# Altium PCB PCB_MiniMac-Rev_2022-03-11.pcbdoc
Units mil, origin at the board's own origin, x right, y up, seen from the top; angles counter-clockwise.
Board outline 3313.8 x 3402.11 mil, 2 copper layers (Top Layer, Bottom Layer); 45 components, 36 nets, 173 pads, 51 vias.
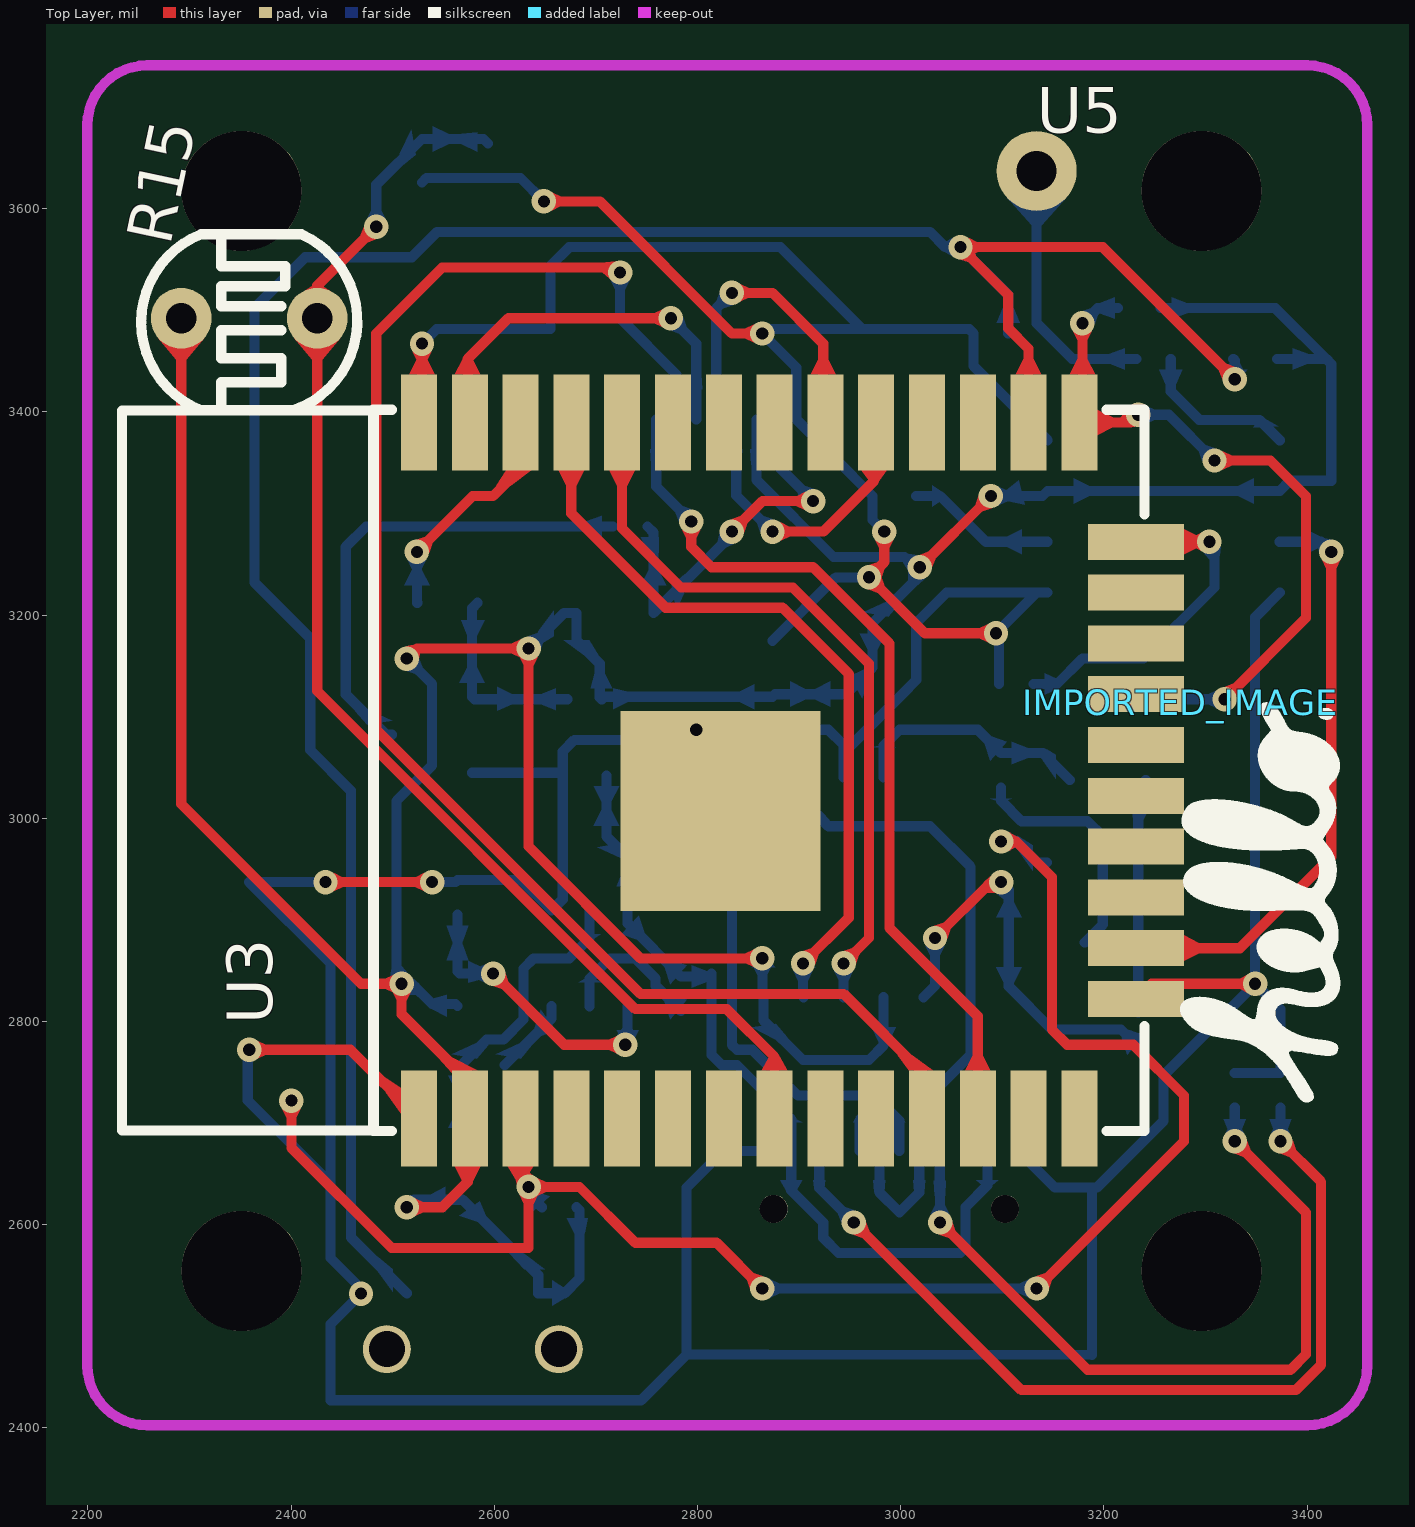
[diagram p0: Top Layer view]
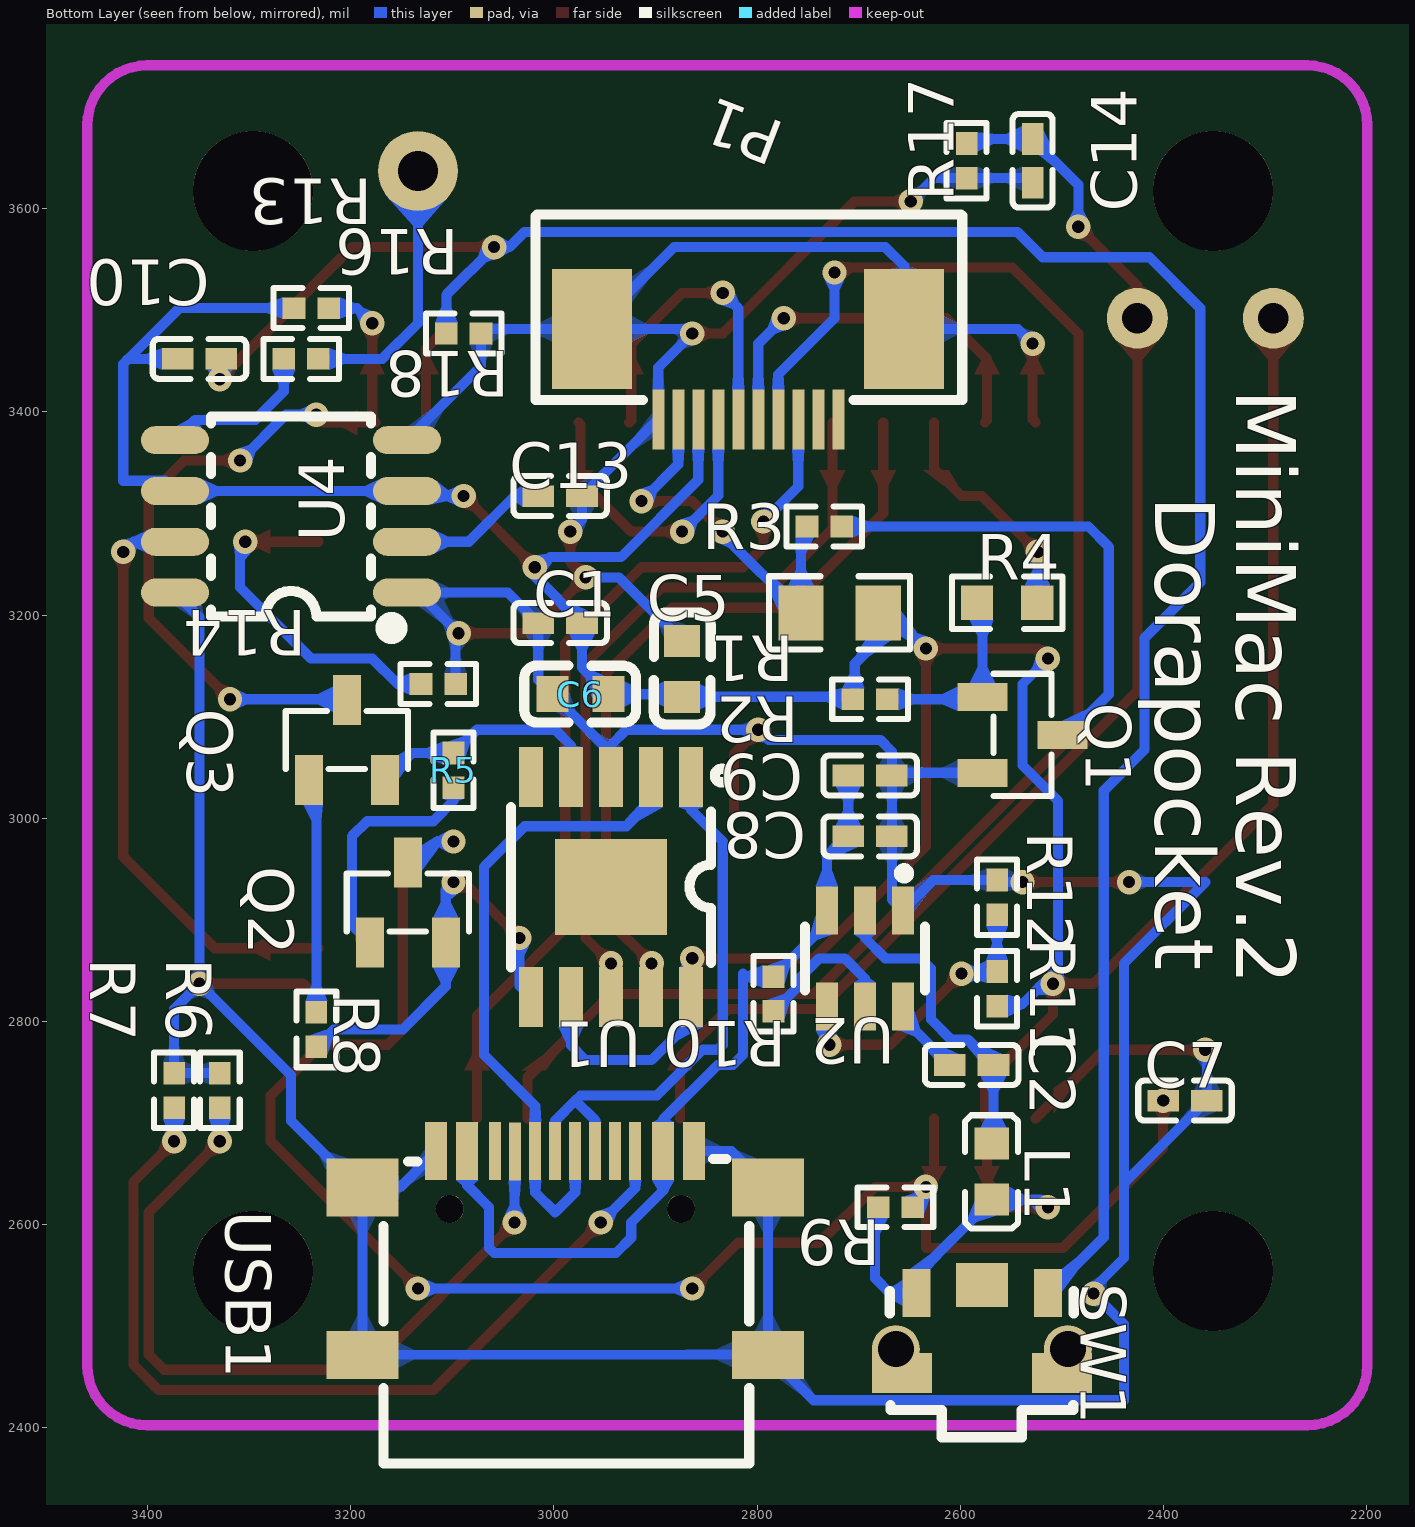
[diagram p1: Bottom Layer view, seen from below]

## Layer stack, top to bottom
Top Layer: signal copper (thickness not stored)
Dielectric: dielectric 12.6, FR-4, Dk 4.8
Bottom Layer: signal copper (thickness not stored)

## Board outline
4313.8,1000 1000,1000 1000,4402.11 4313.8,4402.11

## Components (designator, comment, footprint, x,y, rotation, side; value= is the part's Value field where it differs from the comment)
C1 "100nF" C0402 2993.8,3192.11 r0 bottom
C2 "100nF" C0402 2588.8,2757.11 r0 bottom
C5 "22uF 0603" C0603 2873.8,3147.11 r90 bottom
C6 "22uF 0603" C0603 2973.8,3122.11 r0 bottom
C7 "100nF" C0402 2378.8,2722.11 r180 bottom
C8 "10uF" C0402 2688.8,2982.11 r0 bottom
C9 "10uF" C0402 2688.8,3042.11 r0 bottom
C10 "100nF" C0402 3348.8,3452.11 r180 bottom
C13 "20nF" C0402 2993.8,3317.11 r0 bottom
C14 "100nF" C0402 2528.8,3647.11 r270 bottom
IMPORTED_IMAGE "IMPORTED_IMAGE" IMPORTED_IMAGE 3275.34,3113.97 r0 top
L1 "2.2uH 0603" L0603 2568.8,2652.11 r270 bottom
P1 "FPC 0.5MM 10P 下接" FPC-SMD_FPC0.5MM10P 2808.8,3437.11 r180 bottom
Q1 "S8050" SOT-23-3_L2.9-W1.3-P1.90-LS2.4-BR 2538.8,3082.11 r180 bottom
Q2 "SS8050" SOT-23-3_L2.9-W1.3-P1.90-LS2.4-BR 3143.8,2917.11 r90 bottom
Q3 "SS8050" SOT-23-3_L2.9-W1.3-P1.90-LS2.4-BR 3203.8,3077.11 r90 bottom
R1 "0Ω" R0805 2718.8,3202.11 r180 bottom
R2 "10kΩ" R0402 2688.8,3117.11 r180 bottom
R3 "1Ω" R0402 2733.8,3287.11 r180 bottom
R4 "220Ω" R0603 2553.8,3212.11 r0 bottom
R5 "10kΩ" R0402 3098.8,3047.11 r90 bottom
R6 "2kΩ" R0402 3328.8,2732.11 r90 bottom
R7 "2kΩ" R0402 3373.8,2732.11 r90 bottom
R8 "10kΩ" R0402 3233.8,2792.11 r90 bottom
R9 "10kΩ" R0402 2663.8,2617.11 r180 bottom
R10 "10kΩ" R0402 2783.8,2827.11 r270 bottom
R11 "33kΩ" R0402 2563.8,2832.11 r90 bottom
R12 "10kΩ" R0402 2563.8,2922.11 r90 bottom
R13 "5.1kΩ" R0402 3238.8,3502.11 r180 bottom
R14 "5.1kΩ" R0402 3113.8,3132.11 r0 bottom
R15 "GL5528" RES-TH_L5.1-W4.3-P3.40-D0.5 2358.8,3492.11 r90 top
R16 "1kΩ" R0402 3248.8,3452.11 r180 bottom
R17 "10kΩ" R0402 2593.8,3647.11 r270 bottom
R18 "10kΩ" R0402 3088.8,3477.11 r180 bottom
SW1 "TS-1010A-B" SW-SMD_TS-1010A-B 2578.81,2497.11 r90 bottom
U1 "CH340K" ESOP-10_L4.9-W3.9-P1.00-LS6.2-BL-EP 2943.8,2932.11 r180 bottom
U2 "TPS563208DDCR" TSOT-23-6_L2.9-W1.6-P0.95-LS2.8-BL 2693.8,2862.11 r180 bottom
U3 "ESP32-WROOM-32" WIFIM-SMD_39P-L25.5-W18.0-P1.27 2878.8,3047.11 r90 top
U4 "PT8022WS-S08" SOP-8_L5.0-W4.0-P1.27-LS6.2-BL 3258.8,3297.11 r270 bottom
U5 "焊盘" 焊盘 3133.8,3637.11 r0 top
USB1 "TYPEC-304S-ACP16" USB-C-SMD_TYPEC-304S-ACP16 2988.8,2572.11 r0 bottom
? "" ? 2828.8,1949.56 r0 top
? "" ? 2503.9,2041.09 r0 top
? "" ? 2385.85,2160.38 r0 top
? "" ? 1850.4,3069.61 r0 top

## Footprints (in the part's own frame and the unit in brackets; to place one, negate y for a bottom-side part, rotate by r counter-clockwise, add the part's x,y. Pads: shape width x height; smd on the part's side, far side on the other; paste and mask are expansions set on the pad)
C0402 [mm]
  rect 0.79x0.54 smd: 1(0.545,0) 2(-0.545,0)
  silkscreen extent -1.17,-0.5 1.17,0.5
C0603 [mm]
  rect 0.8x0.9 smd: 1(0.7,0) 2(-0.7,0)
  silkscreen extent -1.39,-0.72 1.41,0.71
ESOP-10_L4.9-W3.9-P1.00-LS6.2-BL-EP [mm]
  rect 0.6x1.5 smd: 1(2,2.75) 2(1,2.75) 3(0,2.75) 4(-1,2.75) 5(-2,2.75) 6(-2,-2.75) 7(-1,-2.75) 8(0,-2.75) 9(1,-2.75) 10(2,-2.75)
  rect 2.8x2.4 smd: 11(0,0)
  silkscreen extent -2.5,-2 2.94,2.96
FPC-SMD_FPC0.5MM10P [mm]
  rect 0.3x1.5 smd: 1(-2.245,-1.13) 2(-1.746,-1.13) 3(-1.246,-1.13) 4(-0.746,-1.13) 5(-0.246,-1.13) 6(0.254,-1.13) 7(0.754,-1.13) 8(1.254,-1.13) 9(1.754,-1.13) 10(2.254,-1.13)
  rect 2x3 smd: 11(3.901,1.13) 12(-3.901,1.124)
  silkscreen extent -5.32,-0.64 5.35,3.99
IMPORTED_IMAGE [mil]
  silkscreen extent 0,-394 157,0
L0603 [mm]
  rect 0.8x0.864 smd: 1(0.7,0) 2(-0.7,0)
  silkscreen extent -1.41,-0.67 1.42,0.65
R0402 [mm]
  rect 0.566x0.54 smd: 1(0.433,0) 2(-0.433,0)
  silkscreen extent -0.94,-0.5 0.94,0.5
R0603 [mil]
  rect 31.75x34.02 smd: 1(29.66,0) 2(-29.66,0)
  silkscreen extent -55,-26 55,26
R0805 [mil]
  rect 44.59x54.21 smd: 1(38.04,0) 2(-38.04,0)
  silkscreen extent -69,-36 69,36
RES-TH_L5.1-W4.3-P3.40-D0.5 [mil]
  round 60 hole 30: 1(0,66.93) 2(0,-66.93)
  silkscreen extent -91,-106 83,106
SOP-8_L5.0-W4.0-P1.27-LS6.2-BL [mm]
  oval 0.7x1.7 smd: 1(1.905,2.9) 2(0.635,2.9) 3(-0.635,2.9) 4(-1.905,2.9) 5(-1.905,-2.9) 6(-0.635,-2.9) 7(0.635,-2.9) 8(1.905,-2.9)
  silkscreen extent -2.5,-2 2.99,2.71
SOT-23-3_L2.9-W1.3-P1.90-LS2.4-BR [mm]
  rect 1.25x0.7 smd: 1(-1,0.95) 2(-1,-0.95) 3(1,0)
  silkscreen extent -0.73,-1.53 0.73,1.53
SW-SMD_TS-1010A-B [mm]
  rect 1.2x0.7 smd: 1(0.9,-1.65) 2(0.9,1.635)
  rect 1.1x1.3 smd: 3(1.1,0)
  rect 1x1.5 smd: 4(-1.1,-2) 5(-1.1,2)
  round 1.2 hole 0.9: 4(-0.5,-2.15) 5(-0.5,2.15)
  silkscreen extent -2.7,-2.3 0.95,2.3
TSOT-23-6_L2.9-W1.6-P0.95-LS2.8-BL [mm]
  rect 0.55x1.2 smd: 1(0.95,1.2) 2(0,1.2) 3(-0.95,1.2) 4(-0.95,-1.2) 5(0,-1.2) 6(0.95,-1.2)
  silkscreen extent -1.5,-0.8 1.5,2.25
USB-C-SMD_TYPEC-304S-ACP16 [mm]
  rect 1.8x1.45 smd: 13(5.07,-1.632) 14(-5.07,-1.632)
  rect 1.8x1.2 smd: 15(5.07,2.548) 16(-5.07,2.548)
  rect 0.55x1.45 smd: A1B12(3.225,-2.547) A4B9(2.45,-2.547) B1A12(-3.22,-2.547) B4A9(-2.45,-2.547)
  rect 0.3x1.45 smd: A5(1.26,-2.532) A6(0.25,-2.547) A7(-0.25,-2.547) A8(-1.25,-2.547) B5(-1.75,-2.547) B6(-0.75,-2.547) B7(0.75,-2.547) B8(1.75,-2.547)
  round 0.7 hole 0.7 unplated: ""(-2.89,-1.102) ""(2.89,-1.102)
  silkscreen extent -4.6,-2.35 4.54,5.26
WIFIM-SMD_39P-L25.5-W18.0-P1.27 [mm]
  rect 2.4x0.9 smd: 1(-8.7,8.965) 2(-8.7,7.695) 3(-8.7,6.425) 4(-8.7,5.155) 5(-8.7,3.885) 6(-8.7,2.615) 7(-8.7,1.345) 8(-8.7,0.075) 9(-8.7,-1.195) 10(-8.7,-2.465) 11(-8.7,-3.735) 12(-8.7,-5.005) 13(-8.7,-6.275) 14(-8.7,-7.545) 25(8.7,-7.545) 26(8.7,-6.275) 27(8.7,-5.005) 28(8.7,-3.735) 29(8.7,-2.465) 30(8.7,-1.195) 31(8.7,0.075) 32(8.7,1.345) 33(8.7,2.615) 34(8.7,3.885) 35(8.7,5.155) 36(8.7,6.425) 37(8.7,7.695) 38(8.7,8.965)
  rect 0.9x2.4 smd: 15(-5.715,-8.965) 16(-4.445,-8.965) 17(-3.175,-8.965) 18(-1.905,-8.965) 19(-0.635,-8.965) 20(0.635,-8.965) 21(1.905,-8.965) 22(3.175,-8.965) 23(4.445,-8.965) 24(5.715,-8.965)
  rect 5x5 smd: 39(-1.017,1.422)
  silkscreen extent -9.02,-9.17 9.02,16.39
焊盘 [mm]
  round 2 hole 1: 1(0,0)
? [mil]

## Free pads (board coordinates)
  round 118.11 hole 118.11 unplated: ""(2351.28,2554.59) ""(2351.28,3617.58) ""(3296.16,2554.59) ""(3296.16,3617.58)

## Via types
v1: diameter 24, hole 12, Top Layer to Bottom Layer, tented both sides, 51 vias

## Nets (pads, with @x,y where several pads share a name; then routed paths per layer and width w, separated by ;. In a path a pad name is that pad's centre, name@x,y a point inside that pad or via, vN(x,y) a via of type N, cw(c..) or ccw(c..) an arc to the next point about the centre after c; other vN are vias at no path point)
3V3: C1.2 C5.2 C6.2 C10.2 L1.1 P1.3 R1.1 R2.2 R9.2 R11.2 R13.2 R15.1 SW1.2 U1.7 U1.10 U3.2 U4.3 U4.6 | length 4230.9
  Top Layer w10: R15.1 2291.9,3014.01 2468.8,2837.11 v1(2508.8,2837.11) 2508.8,2807.11 2575.8,2740.11 U3.2 2573.8,2702.51 2573.8,2642.11 2548.8,2617.11 v1(2513.8,2617.11) ; v1(2513.8,3157.11) 2523.8,3167.11 v1(2633.8,3167.11) 2633.8,2972.11 2743.8,2862.11 v1(2863.8,2862.11) ; v1(3018.8,3247.11) v1(3088.8,3317.11)
  Bottom Layer w10: v1(2513.8,2617.11) 2521.2,2624.51 2568.8,2624.51 2643.2,2550.21 SW1.2 2669.2,2532.51 2683.8,2547.11 2683.8,2614.11 R9.2 ; v1(2513.8,3157.11) 2538.8,3132.11 2538.8,3052.11 2503.8,3017.11 2503.8,2837.11 v1(2508.8,2837.11) 2518.8,2837.11 2538.8,2817.11 2561.8,2817.11 R11.2 ; v1(2633.8,3167.11) 2668.8,3202.11 R1.1 2680.8,3175.11 2703.8,3152.11 2703.8,3119.11 R2.2 2708.3,3119.51 2873.8,3119.51 2876.4,3122.11 C6.2 2972.3,3148.21 C1.2 3018.8,3238.61 v1(3018.8,3247.11) 3013.8,3247.11 3003.8,3257.11 2933.8,3257.11 2857.9,3333.01 P1.3 ; v1(2863.8,2862.11) 2863.8,2825.11 U1.10 2865.1,2800.81 2903.8,2762.11 2968.8,2762.11 2983.2,2776.51 U1.7 ; v1(3088.8,3317.11) 3139.6,3317.11 U4.3 U4.6 3383,3332.11 3423.8,3332.11 3423.8,3427.11 3423.8,3447.11 ; R13.2 3368.8,3502.11 3423.8,3447.11 ; C10.2 3418.8,3452.11 3423.8,3447.11
+5V: C8.1 C9.1 R10.2 U2.3 USB1.A4B9 USB1.B4A9 | length 826.5
  Bottom Layer w10: C9.1 C8.1 2731.2,2961.21 2731.2,2909.31 2731.2,2896.71 2783.8,2844.11 2810.8,2844.11 2813.8,2847.11 2813.8,2767.11 2823.8,2757.11 2838.8,2757.11 2892.3,2703.61 USB1.B4A9 2892.3,2633.61 2923.8,2602.11 2923.8,2587.11 2938.8,2572.11 2988.8,2572.11 3058.8,2572.11 3063.8,2577.11 3063.8,2617.11 3085.3,2638.61 USB1.A4B9
A4: C14.2 R15.2 R17.2 U3.8 | length 1312.7
  Top Layer w10: R15.2 2425.7,3125.21 2738.8,2812.11 2828.8,2812.11 2875.8,2765.11 U3.8 ; R15.2 2425.73,3524.04 v1(2483.8,3582.11)
  Bottom Layer w10: v1(2483.8,3582.11) 2483.8,3623.61 C14.2 2589.4,3668.61 R17.2@2593.8,3664.11
CS: P1.4 U3.29 | length 304.3
  Top Layer w10: v1(2873.8,3282.11) 2923.8,3282.11 2973.8,3332.11 2973.8,3387.61 U3.29
  Bottom Layer w10: P1.4 2838.2,3317.71 v1(2873.8,3282.11)
D+: U1.1 USB1.A6 USB1.B6 | length 559.8
  Bottom Layer w10: U1.1 2865.1,3008.31 2833.8,2977.11 2833.8,2777.11 2838.8,2772.11 2853.8,2772.11 2898.8,2727.11 2973.8,2727.11 2978.8,2722.11 ; USB1.B6 2959.3,2702.61 2978.8,2722.11 ; USB1.A6 2998.6,2702.31 2978.8,2722.11
D-: U1.2 USB1.A7 USB1.B7 | length 652.5
  Bottom Layer w10: U1.2 2904.4,3016.51 2928.8,2992.11 3028.8,2992.11 3068.8,2952.11 3068.8,2767.11 3018.3,2716.61 USB1.B7 3018.3,2631.61 2998.8,2612.11 2979,2631.91 USB1.A7
DC: P1.8 U3.12 | length 877.6
  Top Layer w10: v1(2793.8,3292.11) 2793.8,3267.11 2813.8,3247.11 2913.8,3247.11 2988.8,3172.11 2988.8,2892.11 3075.8,2805.11 U3.12
  Bottom Layer w10: P1.8 2759.4,3326.51 v1(2793.8,3292.11)
DTR: Q3.2 R5.1 U1.4 | length 241.2
  Bottom Layer w10: U1.4 2983.2,3071.51 2998.8,3087.11 3075.8,3087.11 3098.8,3064.11 3140,3064.11 Q3.2
EN: C7.2 Q2.3 R9.1 U3.3 | length 1693.4
  Top Layer w10: v1(2400.26,2722.11) 2400.3,2675.61 2498.8,2577.11 2633.8,2577.11 v1(2633.8,2637.11) ; U3.3 2625.8,2645.11 v1(2633.8,2637.11) ; v1(2863.8,2537.11) 2818.8,2582.11 2738.8,2582.11 2683.8,2637.11 v1(2633.8,2637.11) ; v1(3098.8,2977.11) 3113.8,2977.11 3148.8,2942.11 3148.8,2792.11 3163.8,2777.11 3228.8,2777.11 3278.8,2727.11 3278.8,2682.11 v1(3133.8,2537.11)
  Bottom Layer w10: v1(2633.8,2637.11) 2633.8,2630.11 R9.1 ; v1(2863.8,2537.11) v1(3133.8,2537.11) ; v1(3098.8,2977.11) 3113.8,2977.11 3134.4,2956.51 Q2.3
GND: C1.1 C5.1 C6.1 C7.1 C8.2 C9.2 C13.2 C14.1 P1.1 P1.11 P1.12 Q1.2 R6.1 R7.1 R12.1 R14.2 R17.1 R18.1 U1.3 U2.1 U3.1 U3.15 U3.38 U3.39 U4.1 U4.4 U4.8 USB1.13 USB1.14 USB1.15 USB1.16 USB1.A1B12 USB1.B1A12 | length 6482.4
  Top Layer w10: v1(2358.8,2772.11) 2458.3,2772.11 U3.1 ; v1(2433.8,2937.11) v1(2538.8,2937.11) ; U3.38 2528.8,3392.61 v1(2528.8,3467.11) ; v1(2648.8,3607.11) 2703.8,3607.11 2833.8,3477.11 v1(2863.8,3477.11) ; v1(2798.8,3087.11) 2822.81,3063.1 U3.39 ; v1(2983.8,3282.11) 2983.8,3252.11 v1(2968.8,3237.11) 3023.8,3182.11 v1(3093.8,3182.11) ; U3.15 3246.8,2837.11 3333.8,2837.11 v1(3348.8,2837.11)
  Bottom Layer w10: v1(2358.8,2772.11) 2357.3,2770.61 C7.1 2438.8,2640.61 ; v1(2433.8,2937.11) 2358.8,2937.11 2438.8,2857.11 2438.8,2587.11 2438.8,2567.11 2468.8,2537.11 v1(2468.8,2532.11) 2438.8,2502.11 2438.8,2427.11 2744.5,2427.11 USB1.16 ; v1(2528.8,3467.11) 2543.3,3481.61 P1.11 2655.2,3543.51 2673.8,3562.11 2881.7,3562.11 P1.12 ; C14.1@2528.8,3625.61 2533.2,3630.11 R17.1 2625.8,3630.11 v1(2648.8,3607.11) ; v1(2538.8,2937.11) 2561.8,2937.11 2563.8,2939.11 2626.6,2939.11 2656.4,2909.31 2667.3,2920.31 C8.2 C9.2 ; Q1.2 2664.7,3044.71 C9.2 ; USB1.B1A12 2825.2,2672.41 USB1.14 USB1.16 ; C5.1 2936.2,3237.11 v1(2968.8,3237.11) ; v1(2983.8,3282.11) 2972.3,3293.61 C13.2 P1.1 2897.2,3443.71 v1(2863.8,3477.11) 2868.1,3481.41 P1.12 ; R14.2 3096.8,3179.11 v1(3093.8,3182.11) 3133.8,3222.11 U4.1 3045.3,3222.11 C1.1 3015.3,3136.01 C6.1 2943.8,3064.51 U1.3 2943.8,3072.11 2928.8,3087.11 v1(2798.8,3087.11) 2788.8,3077.11 2678.8,3077.11 2667.3,3065.61 C9.2 ; USB1.A1B12 3151.8,2636.41 USB1.13 ; U4.4 3071.8,3445.01 R18.1 3067.5,3481.41 P1.12 ; R6.1@3328.8,2749.11 3373.8,2749.11 3373.8,2812.11 v1(3348.8,2837.11) ; U4.8 3348.8,3197.91 v1(3348.8,2837.11) ; USB1.16 2789.5,2472.11 2868.8,2472.11 USB1.15 USB1.13 ; USB1.13 3193.1,2636.41 3258.8,2702.11 3258.8,2747.11 v1(3348.8,2837.11)
IO0: Q3.3 R13.1 U3.25 | length 747.6
  Top Layer w10: v1(3178.8,3487.11) 3178.8,3392.61 U3.25 3226.3,3389.61 v1(3233.8,3397.11) ; v1(3308.8,3352.11) 3363.8,3352.11 3398.8,3317.11 3398.8,3197.11 v1(3318.8,3117.11)
  Bottom Layer w10: v1(3178.8,3487.11) 3193.8,3502.11 R13.1@3213.8,3502.11 ; Q3.3 3204.4,3117.11 v1(3318.8,3117.11) ; v1(3233.8,3397.11) 3263.8,3397.11 v1(3308.8,3352.11)
IO4: C10.1 R18.2 SW1.1 U3.26 | length 2413.3
  Top Layer w10: 3105.8,3482.11 3125.8,3462.11 U3.26 ; 3105.84,3482.11 3105.84,3515.07 v1(3058.8,3562.11) 3198.8,3562.11 v1(3328.8,3432.11)
  Bottom Layer w10: SW1.1 2458.8,2587.61 2458.8,3027.11 2418.8,3067.11 2418.8,3177.11 2363.8,3232.11 2363.8,3502.11 2413.8,3552.11 2518.8,3552.11 2543.8,3577.11 3028.8,3577.11 3043.8,3562.11 v1(3058.8,3562.11) 3105.8,3515.11 R18.2 ; C10.1 3328.8,3450.61 v1(3328.8,3432.11)
L1_2: C2.2 L1.2 U2.2 | length 312.8
  Bottom Layer w10: L1.2 2567.3,2681.11 C2.2 2592.3,2782.11 2608.8,2782.11 2628.8,2802.11 2628.8,2852.11 2638.8,2862.11 2673.8,2862.11 2693.8,2882.11 U2.2@2693.8,2909.31
LEDK: P1.2 R1.2 R3.2 | length 387.3
  Top Layer w10: v1(2833.8,3282.11) 2863.8,3312.11 v1(2913.8,3312.11)
  Bottom Layer w10: R3.2 2756.8,3281.11 R1.2 2833.8,3279.11 v1(2833.8,3282.11) ; P1.2 2877.5,3348.41 v1(2913.8,3312.11)
Q1_1: Q1.1 R2.1 R4.1 | length 189.4
  Bottom Layer w10: R4.1 2578.2,3206.81 Q1.1 2580.6,3117.11 R2.1
Q1_3: Q1.3 R3.1 | length 478.5
  Bottom Layer w10: Q1.3 2493.8,3082.11 2453.8,3122.11 2453.8,3267.11 2473.8,3287.11 R3.1
R5_2: Q2.1 R5.2 | length 239.2
  Bottom Layer w10: R5.2 3098.8,3017.11 3118.8,2997.11 3183.8,2997.11 3198.8,2982.11 3198.8,2895.31 Q2.1
R8_1: Q3.1 R8.1 | length 231.7
  Bottom Layer w10: R8.1@3233.8,2809.11 3233.8,3030.31 Q3.1
R16_1: R16.1 U5.1 | length 262.5
  Bottom Layer w10: U5.1 3133.8,3487.11 3168.8,3452.11 R16.1
RES: P1.7 U3.11 | length 1550.6
  Top Layer w10: v1(2723.8,3537.11) 2718.8,3542.11 2548.8,3542.11 2483.8,3477.11 2483.8,3087.11 2743.8,2827.11 2943.8,2827.11 3025.8,2745.11 U3.11
  Bottom Layer w10: v1(2723.8,3537.11) 2723.8,3492.11 2779.1,3436.81 P1.7
RTS: Q2.2 R8.2 U1.6 | length 408.5
  Top Layer w10: v1(3033.8,2882.11) 3088.8,2937.11 v1(3098.8,2937.11)
  Bottom Layer w10: U1.6 3033.8,2835.11 v1(3033.8,2882.11) ; v1(3098.8,2937.11) 3106.4,2929.51 Q2.2 3106.4,2834.51 3148.8,2792.11 3216.8,2792.11 R8.2
RXD: U1.8 U3.34 | length 741.2
  Top Layer w10: U3.34 2725.8,3285.11 2783.8,3227.11 2893.8,3227.11 2968.8,3152.11 2968.8,2882.11 v1(2943.8,2857.11)
  Bottom Layer w10: U1.8 v1(2943.8,2857.11)
S$151: 
SCL: P1.5 U3.30 | length 319.8
  Top Layer w10: v1(2833.8,3517.11) 2873.8,3517.11 2923.8,3467.11 2923.8,3391.71 U3.30
  Bottom Layer w10: P1.5 2818.5,3501.81 v1(2833.8,3517.11)
SDA: P1.6 U3.37 | length 389.7
  Top Layer w10: U3.37 2573.8,3391.71 2573.8,3452.11 2613.8,3492.11 v1(2773.8,3492.11)
  Bottom Layer w10: v1(2773.8,3492.11) 2798.8,3467.11 P1.6
TFT-BL: R4.2 U3.36 | length 231.6
  Top Layer w10: v1(2523.8,3262.11) 2578.8,3317.11 2598.8,3317.11 2625.8,3344.11 U3.36
  Bottom Layer w10: v1(2523.8,3262.11) 2523.8,3212.41 R4.2
TOUCH: U3.16 U4.7 | length 584.2
  Top Layer w10: U3.16 3333.8,2872.11 3423.8,2962.11 v1(3423.8,3262.11)
  Bottom Layer w10: U4.7 3413.8,3272.11 v1(3423.8,3262.11)
TXD: U1.9 U3.35 | length 765.1
  Top Layer w10: U3.35 2675.8,3300.11 2768.8,3207.11 2883.8,3207.11 2948.8,3142.11 2948.8,2902.11 v1(2903.8,2857.11)
  Bottom Layer w10: v1(2903.8,2857.11) 2903.8,2824.51 U1.9
U2_4: R11.1 R12.2 U2.4 | length 289.6
  Top Layer w10: v1(2598.8,2847.11) 2668.8,2777.11 v1(2728.8,2777.11)
  Bottom Layer w10: R12.2 2563.8,2849.11 2565.8,2847.11 v1(2598.8,2847.11) ; v1(2728.8,2777.11) 2731.2,2779.51 U2.4
U2_5: R10.1 U2.5 | length 151.1
  Bottom Layer w10: U2.5 2693.8,2842.11 2713.8,2862.11 2738.8,2862.11 2758.8,2842.11 2758.8,2835.11 R10.1
U2_6: C2.1 U2.6 | length 76.9
  Bottom Layer w10: C2.1 2656.4,2803.21 U2.6
U3_24: R14.1 U3.24 | length 339.5
  Top Layer w10: U3.24 v1(3303.8,3272.11)
  Bottom Layer w10: R14.1 3153.8,3132.11 3178.8,3157.11 3238.8,3157.11 3308.8,3227.11 3308.8,3272.11 v1(3303.8,3272.11)
U4_2: C13.1 U4.2 | length 147.9
  Bottom Layer w10: C13.1 3038.8,3317.11 3083.8,3272.11 U4.2
U4_5: R16.2 U4.5 | length 159.1
  Bottom Layer w10: R16.2 3265.8,3420.11 3293.8,3392.11 3353,3392.11 U4.5
USB1_A5: R6.2 USB1.A5 | length 768
  Top Layer w10: v1(3038.8,2602.11) 3183.8,2457.11 3383.8,2457.11 3398.8,2472.11 3398.8,2612.11 v1(3328.8,2682.11)
  Bottom Layer w10: USB1.A5 v1(3038.8,2602.11) ; v1(3328.8,2682.11) R6.2
USB1_B5: R7.2 USB1.B5 | length 892.6
  Top Layer w10: v1(2953.8,2602.11) 3118.8,2437.11 3388.8,2437.11 3413.8,2462.11 3413.8,2642.11 v1(3373.8,2682.11)
  Bottom Layer w10: USB1.B5 2919.9,2636.01 v1(2953.8,2602.11) ; v1(3373.8,2682.11) R7.2
pads on no net: P1.9 P1.10 SW1.3 SW1.4 SW1.5 U1.5 U1.11 U3.4 U3.5 U3.6 U3.7 U3.9 U3.10 U3.13 U3.14 U3.17 U3.18 U3.19 U3.20 U3.21 U3.22 U3.23 U3.27 U3.28 U3.31 U3.32 U3.33 USB1. USB1.A8 USB1.B8

## Polygon pours and split planes (outlines as drawn)
GND on Bottom Layer (solid): 1933.8,3902.11 1948.8,3887.11 3813.8,3887.11 3658.8,3732.11 3658.8,2162.11 3648.8,2172.11 1958.8,2172.11 1898.8,2232.11 1643.8,2232.11

## Keep-outs
Keep-Out Layer:
  lines w10: 2199.39,2461.56 ccw(c2258.45,2461.56) 2258.45,2402.51 ; 2199.39,3682.03 cw(c2258.45,3682.03) 2258.45,3741.09 ; 3400.18,2402.51 ccw(c3400.18,2461.56) 3459.23,2461.56 ; 3400.18,3741.09 cw(c3400.18,3682.03) 3459.23,3682.03

## Other copper
Top Layer:
  region net GND: 2516.3,3436.87 2541.3,3436.87 2533.8,3451.87 2523.8,3451.87
  region net SDA: 2561.3,3436.87 2586.3,3436.87 2578.8,3451.87 2568.8,3451.87
  region net TFT-BL: 2636.57,3342.38 2611.57,3342.38 2602,3327.38 2616.14,3327.38
  region net TXD: 2688.34,3342.38 2663.34,3342.38 2670.84,3327.38 2680.84,3327.38
  region net RXD: 2738.3,3342.38 2713.3,3342.38 2720.8,3327.38 2730.8,3327.38
  region net SCL: 2911.3,3436.87 2936.3,3436.87 2928.8,3451.87 2918.8,3451.87
  region net CS: 2986.3,3342.38 2961.3,3342.38 2968.8,3332.11 2978.8,3332.11
  region net IO4: 3113.34,3436.87 3138.34,3436.87 3130.84,3451.87 3120.84,3451.87
  region net IO0: 3193.56,3402.12 3193.56,3377.12 3208.56,3384.62 3208.56,3394.62
  region net IO0: 3166.3,3436.87 3191.3,3436.87 3183.8,3451.87 3173.8,3451.87
  region net U3_24: 3278.99,3284.61 3278.99,3259.61 3293.99,3267.11 3293.99,3277.11
  region net TOUCH: 3279,2884.61 3279,2859.61 3294,2867.11 3294,2877.11
  region net DC: 3063.3,2751.84 3088.3,2751.84 3080.8,2766.84 3070.8,2766.84
  region net RES: 3008.13,2751.84 3031.57,2751.84 3011.14,2766.84 2997,2766.84
  region net A4: 2863.34,2751.84 2888.34,2751.84 2880.84,2765.07 2870.84,2765.07
  region net EN: 2638.34,2657.35 2613.34,2657.35 2620.84,2645.07 2630.84,2645.07
  region net 3V3: 2558.13,2749.69 2583.03,2751.84 2558.23,2764.75 2545.22,2763.63
  region net 3V3: 2586.3,2657.35 2561.3,2657.35 2568.8,2642.35 2578.8,2642.35
  region net GND: 2508.13,2709.82 2508.13,2734.82 2493.13,2744.39 2493.13,2730.25
  region net IO4: 3329.55,3444.09 3316.82,3431.36 3313.71,3440.13 3320.78,3447.2
  region net U3_24: 3295.86,3263.11 3295.86,3281.11 3287.46,3277.11 3287.46,3267.11
  region net USB1_B5: 3385.78,2682.86 3373.05,2670.14 3381.82,2667.03 3388.89,2674.1
  region net USB1_A5: 3340.78,2682.86 3328.05,2670.14 3336.82,2667.03 3343.89,2674.1
  region net 3V3: 2521.74,2608.11 2521.74,2626.11 2530.14,2622.11 2530.14,2612.11
  region net GND: 2366.74,2763.11 2366.74,2781.11 2375.14,2777.11 2375.14,2767.11
  region net EN: 2391.26,2714.18 2409.26,2714.18 2405.26,2705.78 2395.26,2705.78
  region net EN: 2622.07,2639.66 2637.79,2648.43 2630.84,2654.17 2620.84,2648.59
  region net EN: 2641.74,2628.11 2641.74,2646.11 2650.14,2642.11 2650.14,2632.11
  region net EN: 2624.8,2629.18 2642.8,2629.18 2638.8,2620.78 2628.8,2620.78
  region net IO0: 3169.8,3479.18 3187.8,3479.18 3183.8,3470.78 3173.8,3470.78
  region net A4: 2484.55,3570.14 2471.82,3582.86 2468.71,3574.1 2475.78,3567.03
  region net GND: 3340.86,2828.11 3340.86,2846.11 3333.8,2842.11 3333.8,2832.11
  region net GND: 2810.78,3087.86 2798.05,3075.14 2806.82,3072.03 2813.89,3079.1
  region net GND: 3085.86,3173.11 3085.86,3191.11 3077.46,3187.11 3077.46,3177.11
  region net GND: 2974.8,3274.18 2992.8,3274.18 2988.8,3265.78 2978.8,3265.78
  region net GND: 2980.78,3236.36 2968.05,3249.09 2976.82,3252.2 2983.89,3245.13
  region net GND: 2980.78,3237.86 2968.05,3225.14 2976.82,3222.03 2983.89,3229.1
  region net GND: 2855.86,3468.11 2855.86,3486.11 2847.46,3482.11 2847.46,3472.11
  region net GND: 2441.74,2928.11 2441.74,2946.11 2450.14,2942.11 2450.14,2932.11
  region net GND: 2530.86,2928.11 2530.86,2946.11 2522.46,2942.11 2522.46,2932.11
  region net GND: 2519.8,3459.18 2537.8,3459.18 2533.8,3450.78 2523.8,3450.78
  region net GND: 2656.74,3598.11 2656.74,3616.11 2665.14,3612.11 2665.14,3602.11
  region net 3V3: 2525.78,3156.36 2513.05,3169.09 2520.26,3170.65 2527.33,3163.58
  region net 3V3: 2499.8,2829.18 2517.8,2829.18 2513.8,2820.78 2503.8,2820.78
  region net 3V3: 2500.86,2828.11 2500.86,2846.11 2492.46,2842.11 2492.46,2832.11
  region net 3V3: 2624.8,3159.18 2642.8,3159.18 2638.8,3150.78 2628.8,3150.78
  region net 3V3: 2625.86,3158.11 2625.86,3176.11 2617.46,3172.11 2617.46,3162.11
  region net 3V3: 2855.86,2853.11 2855.86,2871.11 2847.46,2867.11 2847.46,2857.11
  region net TXD: 2915.78,2856.36 2903.05,2869.09 2911.82,2872.2 2918.89,2865.13
  region net RXD: 2955.78,2856.36 2943.05,2869.09 2951.82,2872.2 2958.89,2865.13
  region net RES: 2719,3548.11 2713.49,3530.97 2706.64,3537.11 2709.85,3547.11
  region net DC: 2784.8,3284.18 2802.8,3284.18 2798.8,3275.78 2788.8,3275.78
  region net IO4: 3070.78,3562.86 3058.05,3550.14 3066.82,3547.03 3073.89,3554.1
  region net IO4: 3066.74,3553.11 3066.74,3571.11 3075.14,3567.11 3075.14,3557.11
  region net LEDK: 2905.86,3303.11 2905.86,3321.11 2897.46,3317.11 2897.46,3307.11
  region net LEDK: 2845.78,3281.36 2833.05,3294.09 2841.82,3297.2 2848.89,3290.13
  region net CS: 2881.74,3273.11 2881.74,3291.11 2890.14,3287.11 2890.14,3277.11
  region net SCL: 2841.74,3508.11 2841.74,3526.11 2850.14,3522.11 2850.14,3512.11
  region net SDA: 2765.86,3483.11 2765.86,3501.11 2757.46,3497.11 2757.46,3487.11
  region net EN: 3106.74,2968.11 3106.74,2986.11 3113.8,2982.11 3113.8,2972.11
  region net EN: 3145.78,2536.36 3133.05,2549.09 3141.82,2552.2 3148.89,2545.13
  region net EN: 2864.55,2549.09 2851.82,2536.36 2848.71,2545.13 2855.78,2552.2
  region net IO0: 3230.87,3385.48 3222.62,3401.47 3216.7,3394.62 3221.86,3384.62
  region net IO0: 3316.74,3343.11 3316.74,3361.11 3325.14,3357.11 3325.14,3347.11
  region net IO0: 3330.78,3116.36 3318.05,3129.09 3326.82,3132.2 3333.89,3125.13
  region net 3V3: 3030.78,3246.36 3018.05,3259.09 3026.82,3262.2 3033.89,3255.13
  region net 3V3: 3089.55,3305.14 3076.82,3317.86 3073.71,3309.1 3080.78,3302.03
  region net TOUCH: 3414.8,3254.18 3432.8,3254.18 3428.8,3245.78 3418.8,3245.78
  region net TFT-BL: 2535.78,3261.36 2523.05,3274.09 2531.82,3277.2 2538.89,3270.13
  region net U2_4: 2720.86,2768.11 2720.86,2786.11 2712.46,2782.11 2712.46,2772.11
  region net U2_4: 2610.78,2847.86 2598.05,2835.14 2606.82,2832.03 2613.89,2839.1
  region net USB1_B5: 2965.78,2602.86 2953.05,2590.14 2961.82,2587.03 2968.89,2594.1
  region net USB1_A5: 3050.78,2602.86 3038.05,2590.14 3046.82,2587.03 3053.89,2594.1
  region net RTS: 3094.29,2925.99 3088.33,2942.97 3081.55,2936.93 3085.22,2926.47
  region net RTS: 3045.78,2881.36 3033.05,2894.09 3041.82,2897.2 3048.89,2890.13
  region net 3V3: 2314.37,3472.27 2269.37,3472.27 2286.87,3451.27 2296.87,3451.27
  region net A4: 2448.23,3472.27 2403.23,3472.27 2420.73,3451.27 2430.73,3451.27
  region net A4: 2448.23,3511.96 2403.23,3511.96 2420.73,3524.04 2430.73,3524.04
Bottom Layer:
  region net U4_5: 3346.77,3384.26 3371.72,3385.89 3360.07,3392.11 3349.46,3388.58
  region net 3V3: 3347.49,3309.61 3347.49,3334.61 3332.49,3327.11 3332.49,3317.11
  region net TOUCH: 3398.46,3259.61 3398.46,3284.61 3413.46,3277.11 3413.46,3267.11
  region net 3V3: 3122.32,3308.59 3116.31,3332.85 3103.51,3322.11 3105.99,3312.11
  region net 3V3: 3170.11,3309.61 3170.11,3334.61 3185.11,3327.11 3185.11,3317.11
  region net U4_2: 3119.14,3259.61 3119.14,3284.61 3104.14,3277.11 3104.14,3267.11
  region net IO4: 3116.97,3487.74 3094.71,3487.74 3100.84,3502.74 3110.84,3502.74
  region net A4: 2583.17,3675.29 2583.17,3656.07 2568.17,3663.57 2568.17,3673.57
  region net U3_24: 3141.97,3142.74 3141.97,3121.48 3153.8,3127.11 3153.8,3137.11
  region net IO0: 3210.63,3491.48 3210.63,3512.74 3195.63,3507.11 3195.63,3497.11
  region net 3V3: 3266.97,3491.48 3266.97,3512.74 3281.97,3507.11 3281.97,3497.11
  region net EN: 2635.63,2611.36 2654.51,2627.74 2637.82,2633.12 2630.25,2626.55
  region net 3V3: 2671.3,2606.48 2691.97,2606.48 2688.8,2591.48 2678.8,2591.48
  region net USB1_B5: 3363.17,2703.94 3384.43,2703.94 3378.8,2688.94 3368.8,2688.94
  region net USB1_A5: 3318.17,2703.94 3339.43,2703.94 3333.8,2688.94 3323.8,2688.94
  region net A4: 2539.43,3656.07 2539.43,3681.07 2554.43,3673.57 2554.43,3663.57
  region net A4: 2522.57,3653.02 2518.17,3677.63 2507.16,3654 2509.31,3642.01
  region net IO4: 3341.3,3441.48 3316.3,3441.48 3323.8,3432.11 3333.8,3432.11
  region net 3V3: 3385.81,3441.48 3385.81,3462.74 3400.81,3457.11 3400.81,3447.11
  region net R16_1: 3220.63,3441.48 3220.63,3462.74 3205.63,3457.11 3205.63,3447.11
  region net U4_5: 3254.71,3441.48 3276.97,3441.48 3270.8,3426.48 3260.8,3426.48
  region net Q1_1: 2590.67,3195.11 2567.58,3195.11 2573.17,3180.11 2583.17,3180.11
  region net TFT-BL: 2536.3,3229.12 2511.3,3229.12 2518.8,3244.12 2528.8,3244.12
  region net Q1_3: 2705.63,3276.48 2705.63,3297.74 2690.63,3292.11 2690.63,3282.11
  region net LEDK: 2744.34,3276.48 2761.97,3276.48 2761.84,3261.48 2751.84,3261.48
  region net Q1_1: 2660.63,3106.48 2660.63,3127.74 2645.63,3122.11 2645.63,3112.11
  region net 3V3: 2716.3,3127.74 2694.71,3127.74 2698.8,3142.74 2708.8,3142.74
  region net 3V3: 2716.97,3107.05 2716.97,3127.74 2731.97,3124.55 2731.97,3114.55
  region net 3V3: 2693.41,3175.01 2668.41,3175.01 2688.83,3160.01 2702.98,3160.01
  region net 3V3: 2658.46,3179.28 2658.46,3204.28 2643.46,3183.85 2643.46,3169.7
  region net LEDK: 2769.34,3229.22 2744.34,3229.22 2751.84,3244.22 2761.84,3244.22
  region net LEDK: 2774.47,3229.22 2779.14,3204.66 2789.94,3228.14 2787.68,3240.02
  region net Q1_3: 2474.82,3092.12 2499.54,3095.89 2475.58,3107.41 2463.31,3105.53
  region net Q1_1: 2590.67,3133.29 2565.67,3133.29 2573.17,3148.29 2583.17,3148.29
  region net Q1_1: 2602.78,3105.73 2602.78,3129.61 2617.78,3122.11 2617.78,3112.11
  region net U4_2: 3030.81,3327.74 3030.81,3306.48 3038.8,3312.11 3038.8,3322.11
  region net U2_5: 2704.62,2838.49 2682.97,2838.49 2688.8,2842.11 2698.8,2842.11
  region net L1_2: 2682.97,2885.74 2704.62,2885.74 2698.8,2882.11 2688.8,2882.11
  region net +5V: 2742.03,2903.89 2724.84,2885.74 2740.46,2880.42 2747.34,2887.69
  region net +5V: 2742.03,2932.98 2720.37,2932.98 2726.2,2947.98 2736.2,2947.98
  region net U2_4: 2720.37,2791.25 2742.03,2791.25 2736.2,2779.51 2726.2,2779.51
  region net U2_6: 2660.1,2791.25 2645.57,2811.59 2639.86,2793.78 2645.75,2785.53
  region net 3V3: 2876.3,2853.38 2853.24,2853.38 2858.8,2862.11 2868.8,2862.11
  region net 3V3: 2876.87,2797.92 2853.24,2794.32 2876.19,2782.65 2888.47,2784.52
  region net TXD: 2916.24,2853.38 2892.61,2853.38 2898.8,2857.11 2908.8,2857.11
  region net RXD: 2955.61,2853.38 2931.98,2853.38 2938.8,2857.11 2948.8,2857.11
  region net 3V3: 2971.35,2794.32 2994.98,2794.32 2988.16,2779.32 2978.16,2779.32
  region net DTR: 2994.98,3069.91 2971.35,3069.91 2978.16,3071.47 2988.16,3071.47
  region net D-: 2916.24,3012.54 2892.61,3010.85 2916.33,2997.51 2929.53,2998.45
  region net D+: 2853.24,3010.85 2876.87,3010.85 2870.05,3008.36 2860.05,3008.36
  region net U2_4: 2553.17,2893.94 2574.43,2893.94 2568.8,2878.94 2558.8,2878.94
  region net U2_4: 2553.17,2860.29 2574.43,2860.29 2568.8,2875.29 2558.8,2875.29
  region net U2_4: 2574.43,2859.61 2574.43,2838.02 2589.43,2842.11 2589.43,2852.11
  region net 3V3: 2553.17,2826.21 2553.17,2804.61 2538.8,2812.11 2538.8,2822.11
  region net U2_5: 2773.17,2802.31 2789.54,2821.21 2774.36,2826.59 2767.79,2819.01
  region net +5V: 2794.43,2833.02 2794.43,2855.29 2809.43,2849.15 2809.43,2839.15
  region net +5V: 2773.17,2836.4 2789.55,2855.29 2774.36,2860.67 2767.79,2853.09
  region net R8_1: 3223.17,2820.29 3244.43,2820.29 3238.8,2835.29 3228.8,2835.29
  region net RTS: 3223.17,2767.31 3239.54,2786.21 3224.36,2791.59 3217.79,2784.01
  region net DTR: 3109.43,3075.29 3109.43,3053.02 3124.43,3059.15 3124.43,3069.15
  region net DTR: 3088.17,3056.4 3104.55,3075.29 3089.36,3080.67 3082.79,3073.09
  region net R5_2: 3088.17,3018.94 3109.43,3018.94 3103.8,3017.11 3093.8,3017.11
  region net IO0: 3217.58,3104.61 3217.58,3129.61 3232.58,3122.11 3232.58,3112.11
  region net DTR: 3152.62,3062.35 3152.62,3039.02 3139.99,3057.08 3143.53,3067.69
  region net R8_1: 3227.42,3013.14 3246.3,3013.14 3238.8,2998.14 3228.8,2998.14
  region net EN: 3130.02,2973.39 3130.02,2948.39 3115.02,2968.82 3115.02,2982.96
  region net RTS: 3118.9,2902.35 3093.9,2902.35 3101.4,2917.35 3111.4,2917.35
  region net RTS: 3093.9,2853.14 3118.9,2853.14 3111.4,2838.14 3101.4,2838.14
  region net R5_2: 3194.98,2879.02 3194.98,2902.35 3198.8,2888.27 3195.26,2898.88
  region net DC: 2753.52,3363.08 2765.33,3363.08 2764.42,3348.08 2754.42,3348.08
  region net RES: 2785.02,3422.14 2773.2,3422.14 2774.12,3436.8 2784.12,3436.8
  region net SDA: 2804.7,3422.14 2792.89,3422.14 2793.79,3437.14 2803.79,3437.14
  region net SCL: 2824.39,3422.14 2812.57,3422.14 2813.48,3437.14 2823.48,3437.14
  region net CS: 2832.26,3363.08 2844.07,3363.08 2843.16,3348.08 2833.16,3348.08
  region net 3V3: 2851.94,3363.08 2863.76,3363.08 2862.9,3348.08 2852.9,3348.08
  region net LEDK: 2871.63,3363.08 2883.44,3363.08 2882.53,3348.38 2872.53,3348.38
  region net L1_2: 2579.84,2695.42 2554.84,2695.42 2562.34,2710.42 2572.34,2710.42
  region net 3V3: 2585.81,2623.1 2565.3,2608.8 2583.25,2603.03 2591.59,2608.84
  region net 3V3: 2551.8,2637.06 2551.8,2612.06 2536.8,2619.56 2536.8,2629.56
  region net +5V: 2722.76,3031.48 2697.76,3031.48 2705.26,3016.48 2715.26,3016.48
  region net +5V: 2725.81,2975.9 2701.2,2971.48 2724.82,2960.48 2736.82,2962.63
  region net +5V: 2697.76,2992.74 2722.76,2992.74 2715.26,3007.74 2705.26,3007.74
  region net 3V3: 2949.7,3139.83 2961.99,3118.06 2968.4,3137.21 2963.3,3146.25
  region net 3V3: 2930.49,3134.61 2930.49,3109.61 2915.49,3117.11 2915.49,3127.11
  region net 3V3: 2856.08,3132.05 2856.08,3107.05 2841.08,3114.55 2841.08,3124.55
  region net 3V3: 2891.51,3109.61 2891.51,3134.61 2906.51,3127.11 2906.51,3117.11
  region net U2_6: 2601.2,2767.74 2625.81,2763.33 2636.82,2776.6 2624.82,2778.75
  region net L1_2: 2554.84,2746.48 2579.84,2746.48 2572.34,2731.48 2562.34,2731.48
  region net L1_2: 2558.28,2767.74 2582.89,2763.34 2593.9,2776.61 2581.91,2778.75
  region net 3V3: 2959.84,3181.48 2984.84,3181.48 2977.34,3166.48 2967.34,3166.48
  region net 3V3: 2963.28,3202.74 2987.89,3198.33 2998.9,3211.6 2986.9,3213.75
  region net +5V: 2881.52,2643.86 2903.17,2643.86 2897.34,2633.57 2887.34,2633.57
  region net +5V: 2903.17,2700.95 2881.52,2700.95 2887.3,2703.61 2897.3,2703.61
  region net USB1_B5: 2914,2643.87 2925.81,2643.87 2924.9,2636.01 2914.9,2636.01
  region net D+: 2965.18,2700.95 2953.37,2700.95 2954.27,2702.59 2964.27,2702.59
  region net D-: 2973.05,2643.87 2984.86,2643.87 2983.96,2631.96 2973.96,2631.96
  region net D+: 3004.55,2700.95 2992.74,2700.95 2993.64,2702.27 3003.64,2702.27
  region net D-: 3012.42,2643.87 3024.23,2643.87 3023.33,2631.64 3013.33,2631.64
  region net D-: 3024.23,2700.95 3012.42,2700.95 3013.33,2715.95 3023.33,2715.95
  region net USB1_A5: 3032.5,2643.28 3044.31,2643.28 3043.65,2628.28 3033.65,2628.28
  region net +5V: 3074.43,2643.86 3096.08,2643.86 3090.25,2638.57 3080.25,2638.57
  region net 3V3: 2649.69,2556.17 2629.4,2556.17 2615.12,2571.17 2629.26,2571.17
  region net 3V3: 2656.96,2520.05 2656.96,2545.05 2669.23,2537.55 2669.23,2527.55
  region net IO4: 2500.07,2556.17 2500.07,2533.84 2485.07,2554.27 2485.07,2568.41
  region net IO4: 3319.8,3440.05 3337.8,3440.05 3333.8,3448.45 3323.8,3448.45
  region net U3_24: 3297.66,3261.8 3314.8,3267.31 3313.8,3258.17 3303.8,3254.95
  region net USB1_B5: 3364.8,2690.05 3382.8,2690.05 3378.8,2698.45 3368.8,2698.45
  region net USB1_A5: 3319.8,2690.05 3337.8,2690.05 3333.8,2698.45 3323.8,2698.45
  region net 3V3: 2524.97,2612.72 2516.76,2628.74 2525.78,2629.56 2530.9,2619.56
  region net EN: 2629.43,2625.94 2645.43,2634.18 2645.95,2624.99 2636.61,2620.19
  region net IO0: 3190.78,3486.36 3178.05,3499.09 3186.82,3502.2 3193.89,3495.13
  region net A4: 2474.8,3590.05 2492.8,3590.05 2488.8,3598.45 2478.8,3598.45
  region net 3V3: 2525.78,3157.86 2513.05,3145.14 2521.82,3142.03 2528.89,3149.1
  region net 3V3: 2519.27,2842.97 2513.31,2825.99 2522.38,2826.47 2526.05,2836.93
  region net 3V3: 2514.94,2847.42 2497.8,2841.91 2498.8,2851.06 2508.8,2854.27
  region net 3V3: 2645.78,3166.36 2633.05,3179.09 2641.82,3182.2 2648.89,3175.13
  region net 3V3: 2854.8,2854.18 2872.8,2854.18 2868.8,2845.78 2858.8,2845.78
  region net TXD: 2894.8,2849.18 2912.8,2849.18 2908.8,2840.78 2898.8,2840.78
  region net RXD: 2934.8,2849.18 2952.8,2849.18 2948.8,2840.78 2938.8,2840.78
  region net RES: 2714.8,3529.18 2732.8,3529.18 2728.8,3520.78 2718.8,3520.78
  region net DC: 2794.55,3304.09 2781.82,3291.36 2778.71,3300.13 2785.78,3307.2
  region net IO4: 3070.78,3562.86 3058.05,3550.14 3066.82,3547.03 3073.89,3554.1
  region net IO4: 3050.86,3553.11 3050.86,3571.11 3043.8,3567.11 3043.8,3557.11
  region net LEDK: 2914.55,3324.09 2901.82,3311.36 2898.71,3320.13 2905.78,3327.2
  region net LEDK: 2836.12,3270.34 2821.83,3281.28 2819.86,3272.21 2827.87,3266.07
  region net CS: 2874.55,3294.09 2861.82,3281.36 2858.71,3290.13 2865.78,3297.2
  region net SCL: 2834.55,3505.14 2821.82,3517.86 2818.71,3509.1 2825.78,3502.03
  region net SDA: 2785.78,3492.86 2773.05,3480.14 2781.82,3477.03 2788.89,3484.1
  region net EN: 3106.74,2968.11 3106.74,2986.11 3113.8,2982.11 3113.8,2972.11
  region net EN: 3125.86,2528.11 3125.86,2546.11 3117.46,2542.11 3117.46,2532.11
  region net EN: 2871.74,2528.11 2871.74,2546.11 2880.14,2542.11 2880.14,2532.11
  region net IO0: 3241.74,3388.11 3241.74,3406.11 3250.14,3402.11 3250.14,3392.11
  region net IO0: 3309.55,3364.09 3296.82,3351.36 3293.71,3360.13 3300.78,3367.2
  region net IO0: 3310.86,3108.11 3310.86,3126.11 3302.46,3122.11 3302.46,3112.11
  region net 3V3: 3007.39,3243.38 3023.92,3236.26 3017.28,3229.98 3007.39,3234.24
  region net 3V3: 3016.94,3258.97 3007.27,3243.79 3002.27,3251.57 3007.77,3260.21
  region net 3V3: 3096.74,3308.11 3096.74,3326.11 3105.14,3322.11 3105.14,3312.11
  region net TOUCH: 3424.55,3274.09 3411.82,3261.36 3410.26,3268.58 3417.33,3275.65
  region net TFT-BL: 2514.8,3254.18 2532.8,3254.18 2528.8,3245.78 2518.8,3245.78
  region net U2_4: 2738.87,2783.64 2721.06,2786.29 2726.2,2794.02 2736.2,2792.53
  region net U2_4: 2590.86,2838.11 2590.86,2856.11 2582.46,2852.11 2582.46,2842.11
  region net USB1_B5: 2954.55,2614.09 2941.82,2601.36 2938.71,2610.13 2945.78,2617.2
  region net USB1_A5: 3047.75,2610.1 3029.75,2610 3033.71,2618.42 3043.71,2618.48
  region net RTS: 3094.52,2925.9 3110.46,2934.27 3111.4,2925.28 3101.4,2920.02
  region net RTS: 3024.8,2874.18 3042.8,2874.18 3038.8,2865.78 3028.8,2865.78
  region net R16_1: 3163.33,3611.07 3104.27,3611.07 3128.8,3583.51 3138.8,3583.51

## Silkscreen, mask and mechanical layers (free items; w line width, h text height)
Bottom Overlay:
  text "MiniMac Rev.2" at 2328.33,3422.11 h59.05 r90
  text "Dorapocket" at 2408.33,3317.11 h59.05 r90